# Altium PCB ESC.PcbDoc (part 1 of 2)
Units mm, origin at the board's own origin, x right, y up, seen from the top; angles counter-clockwise.
Board outline 33 x 33 mm, 4 copper layers (Top Layer, Layer 2, Layer 3, Bottom Layer), stack 0.603 mm thick; 138 components, 119 nets, 637 pads, 195 vias.
Unrouted connection lines stored in the file: 127.
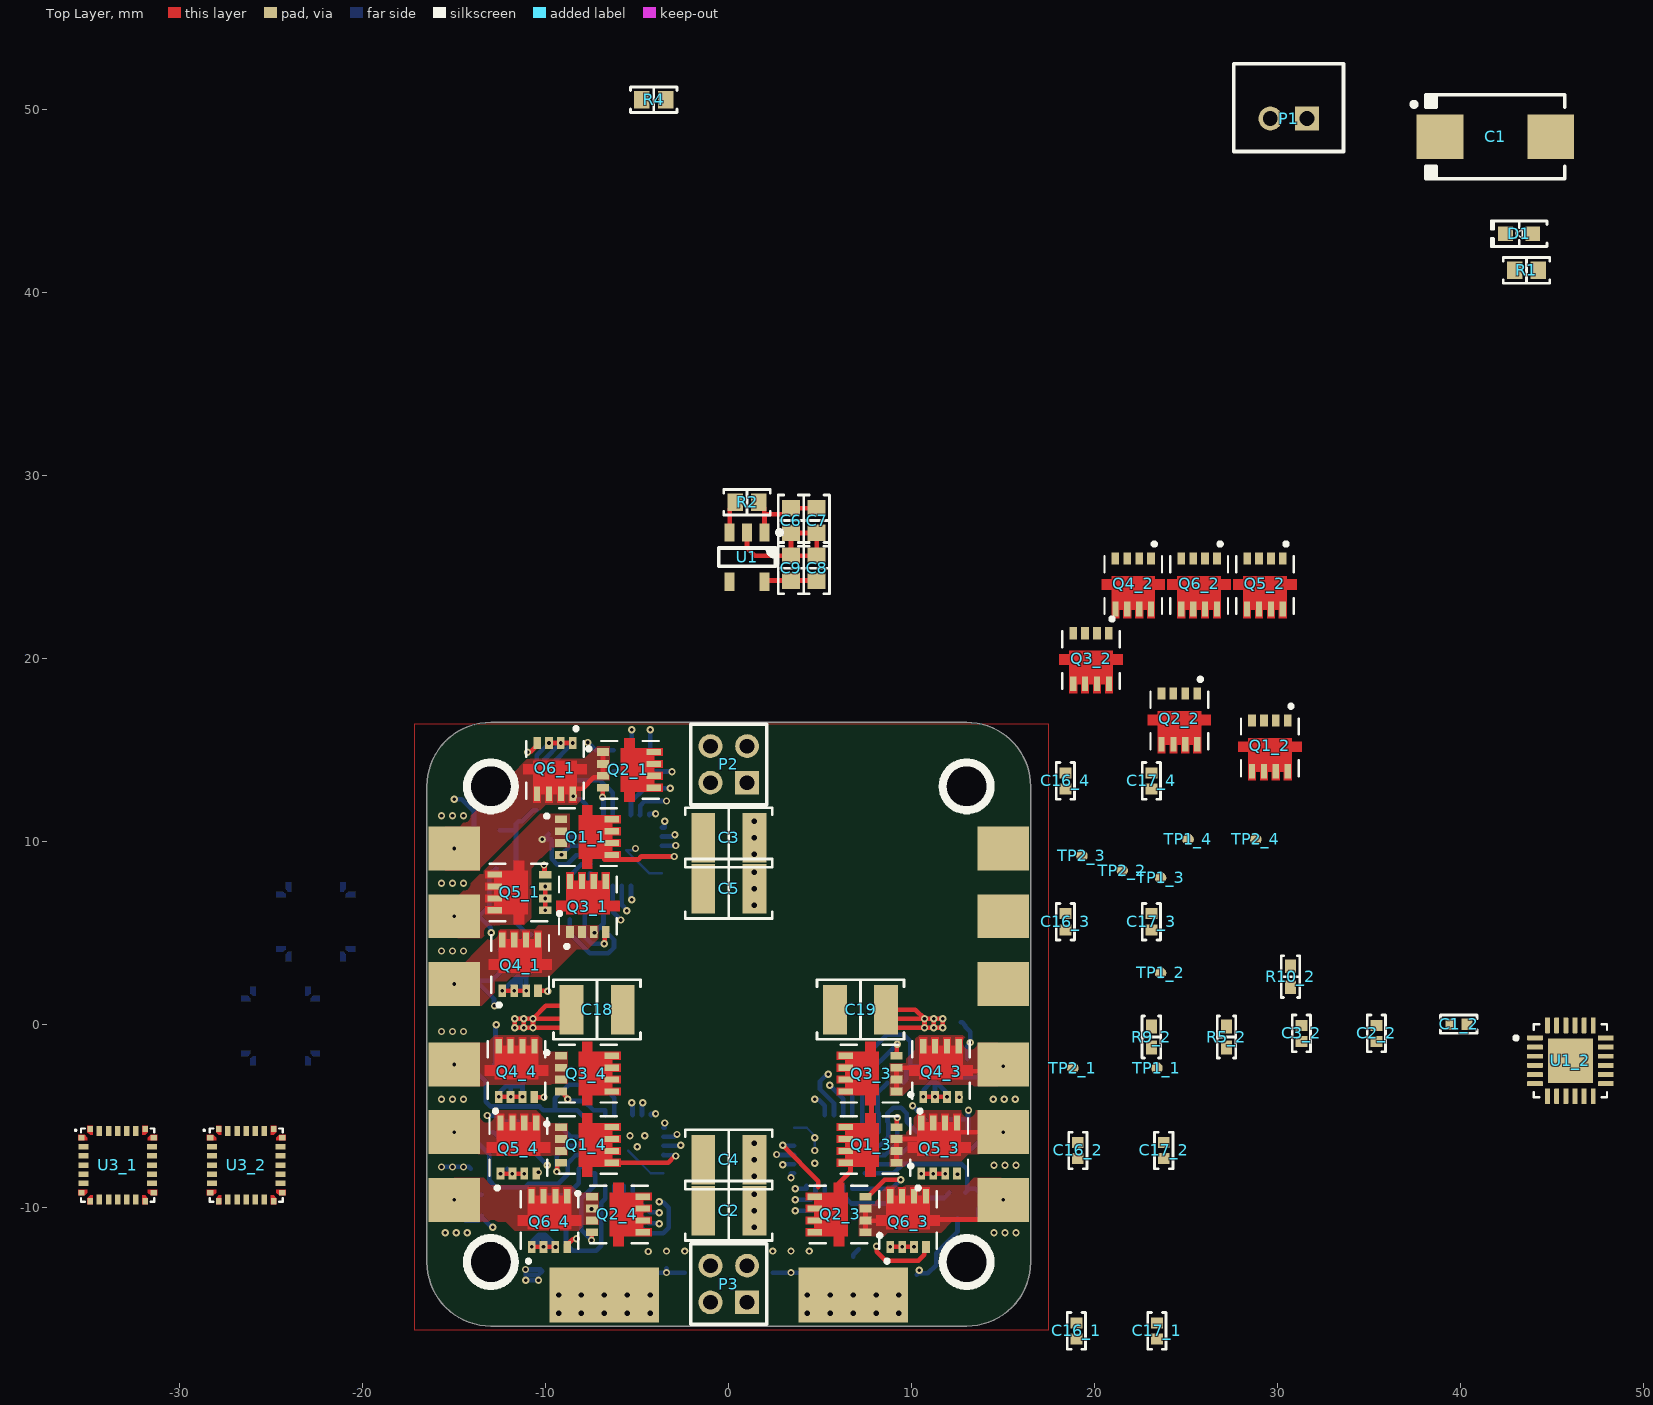
[diagram p0: Top Layer view]
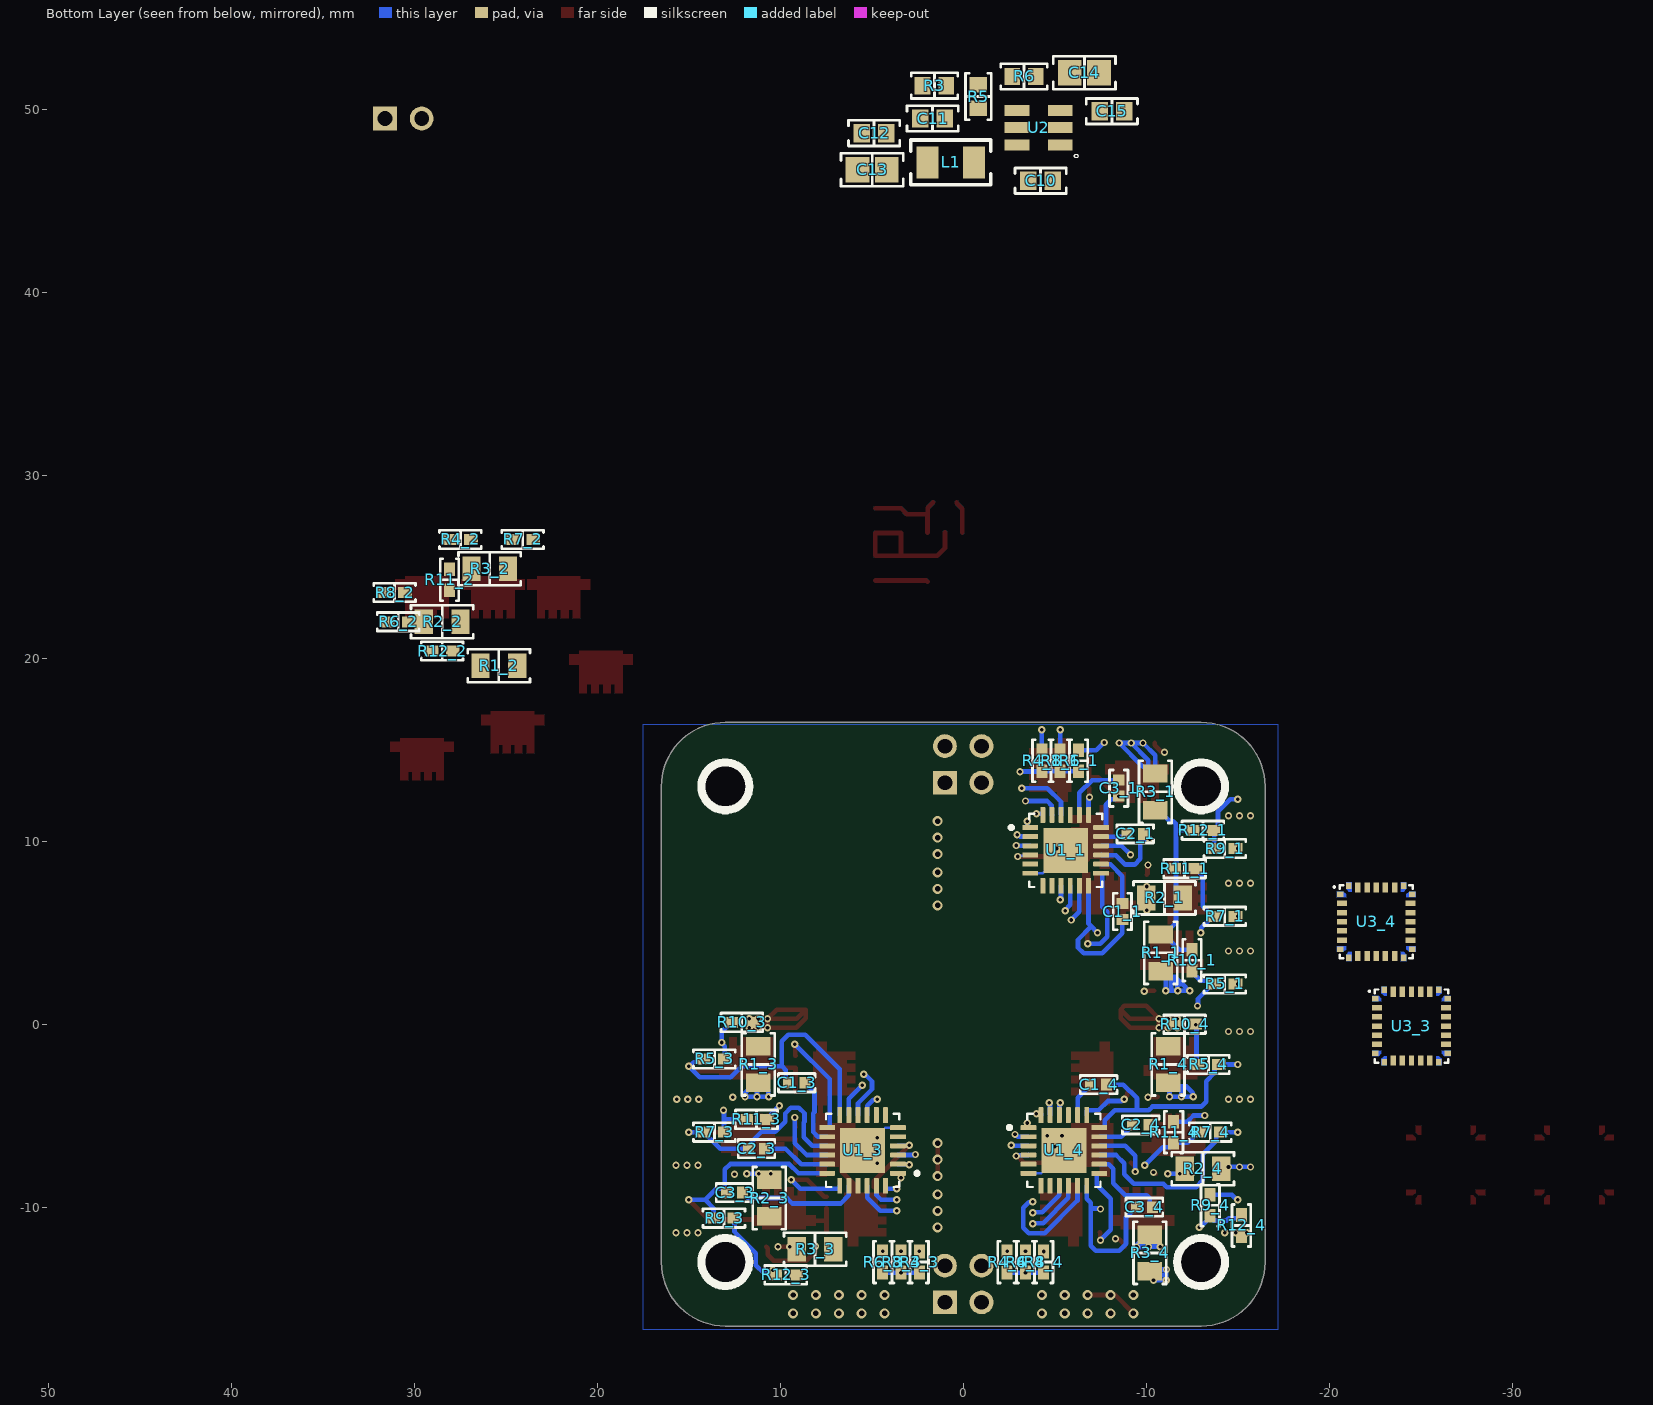
[diagram p1: Bottom Layer view, seen from below]
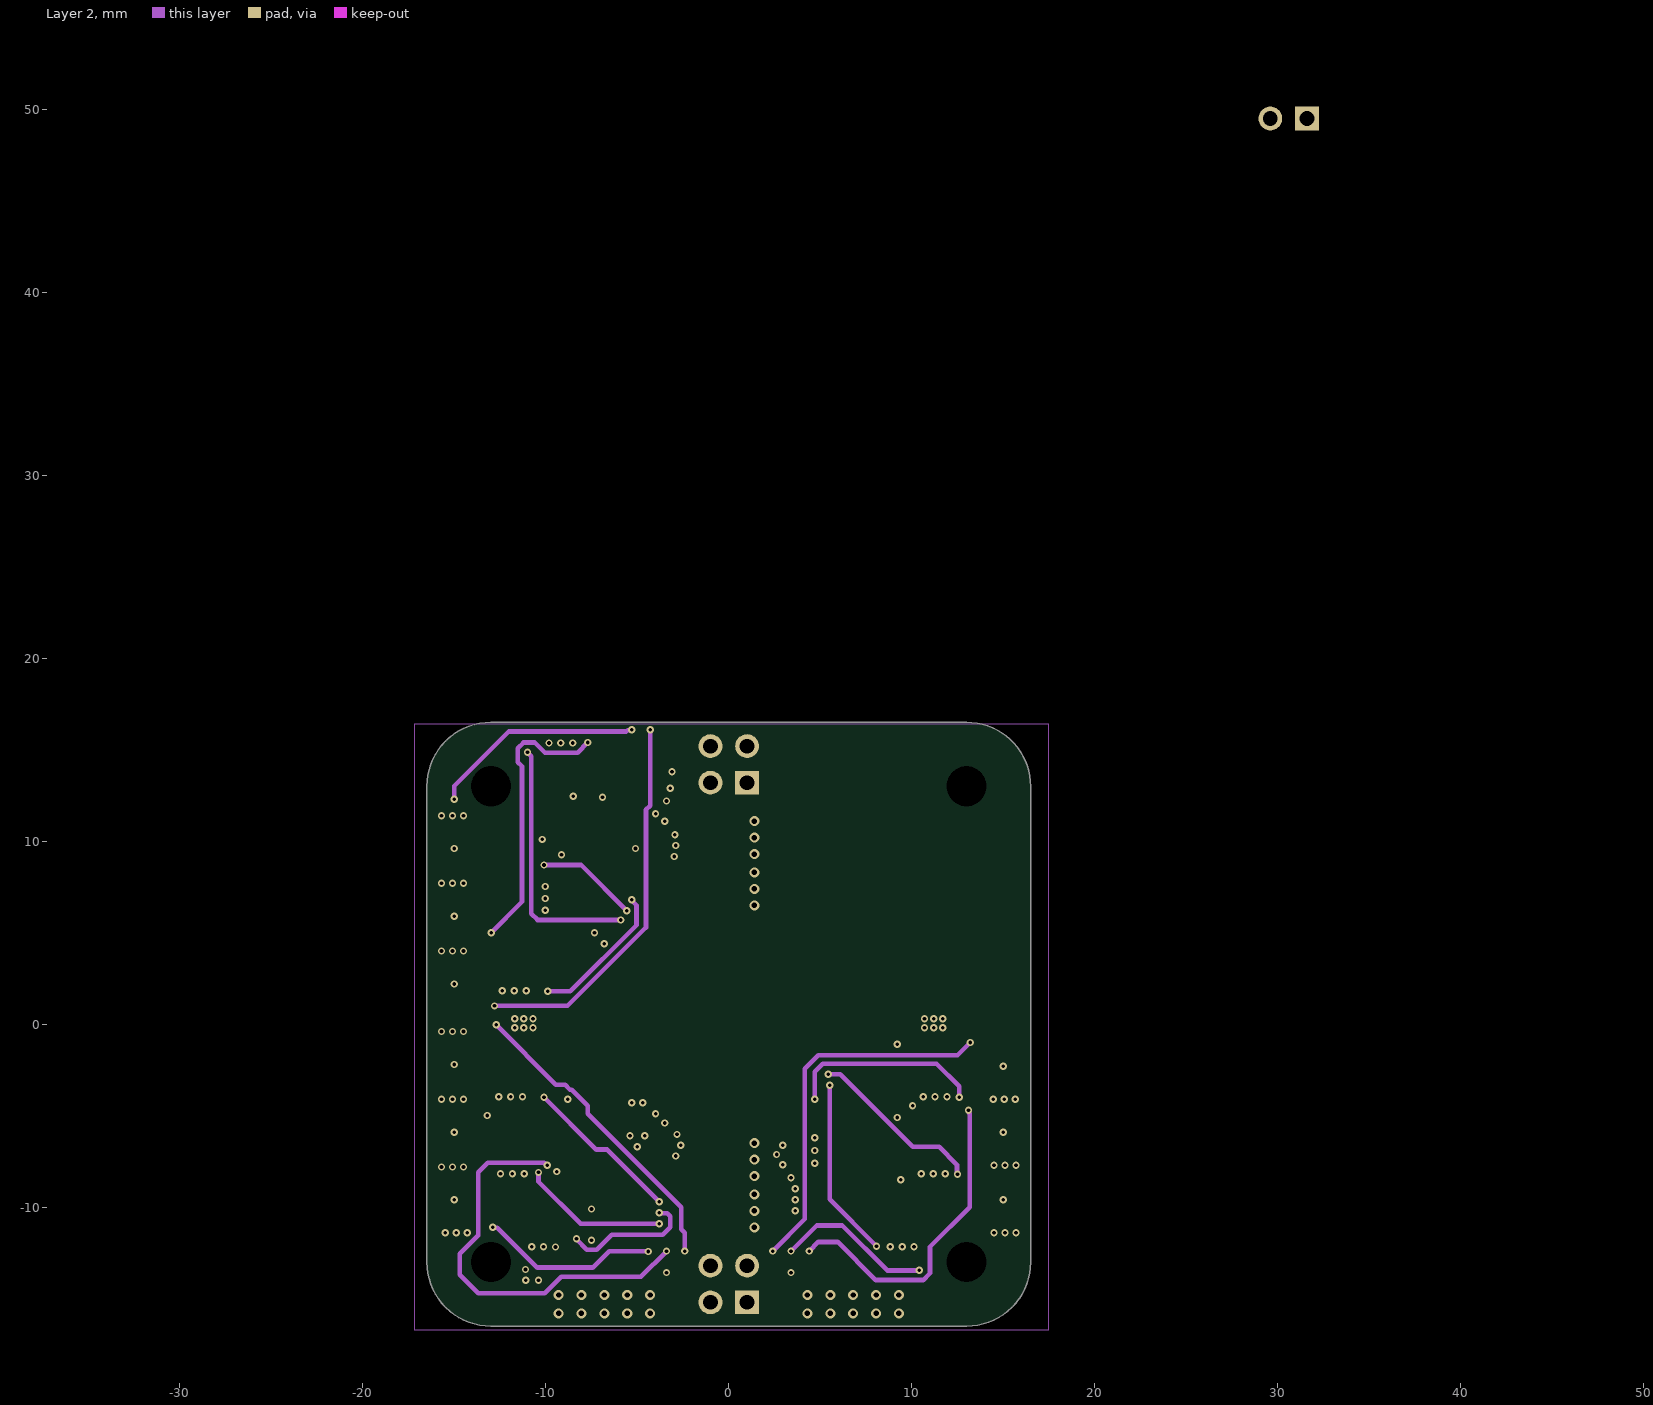
[diagram p2: Layer 2]
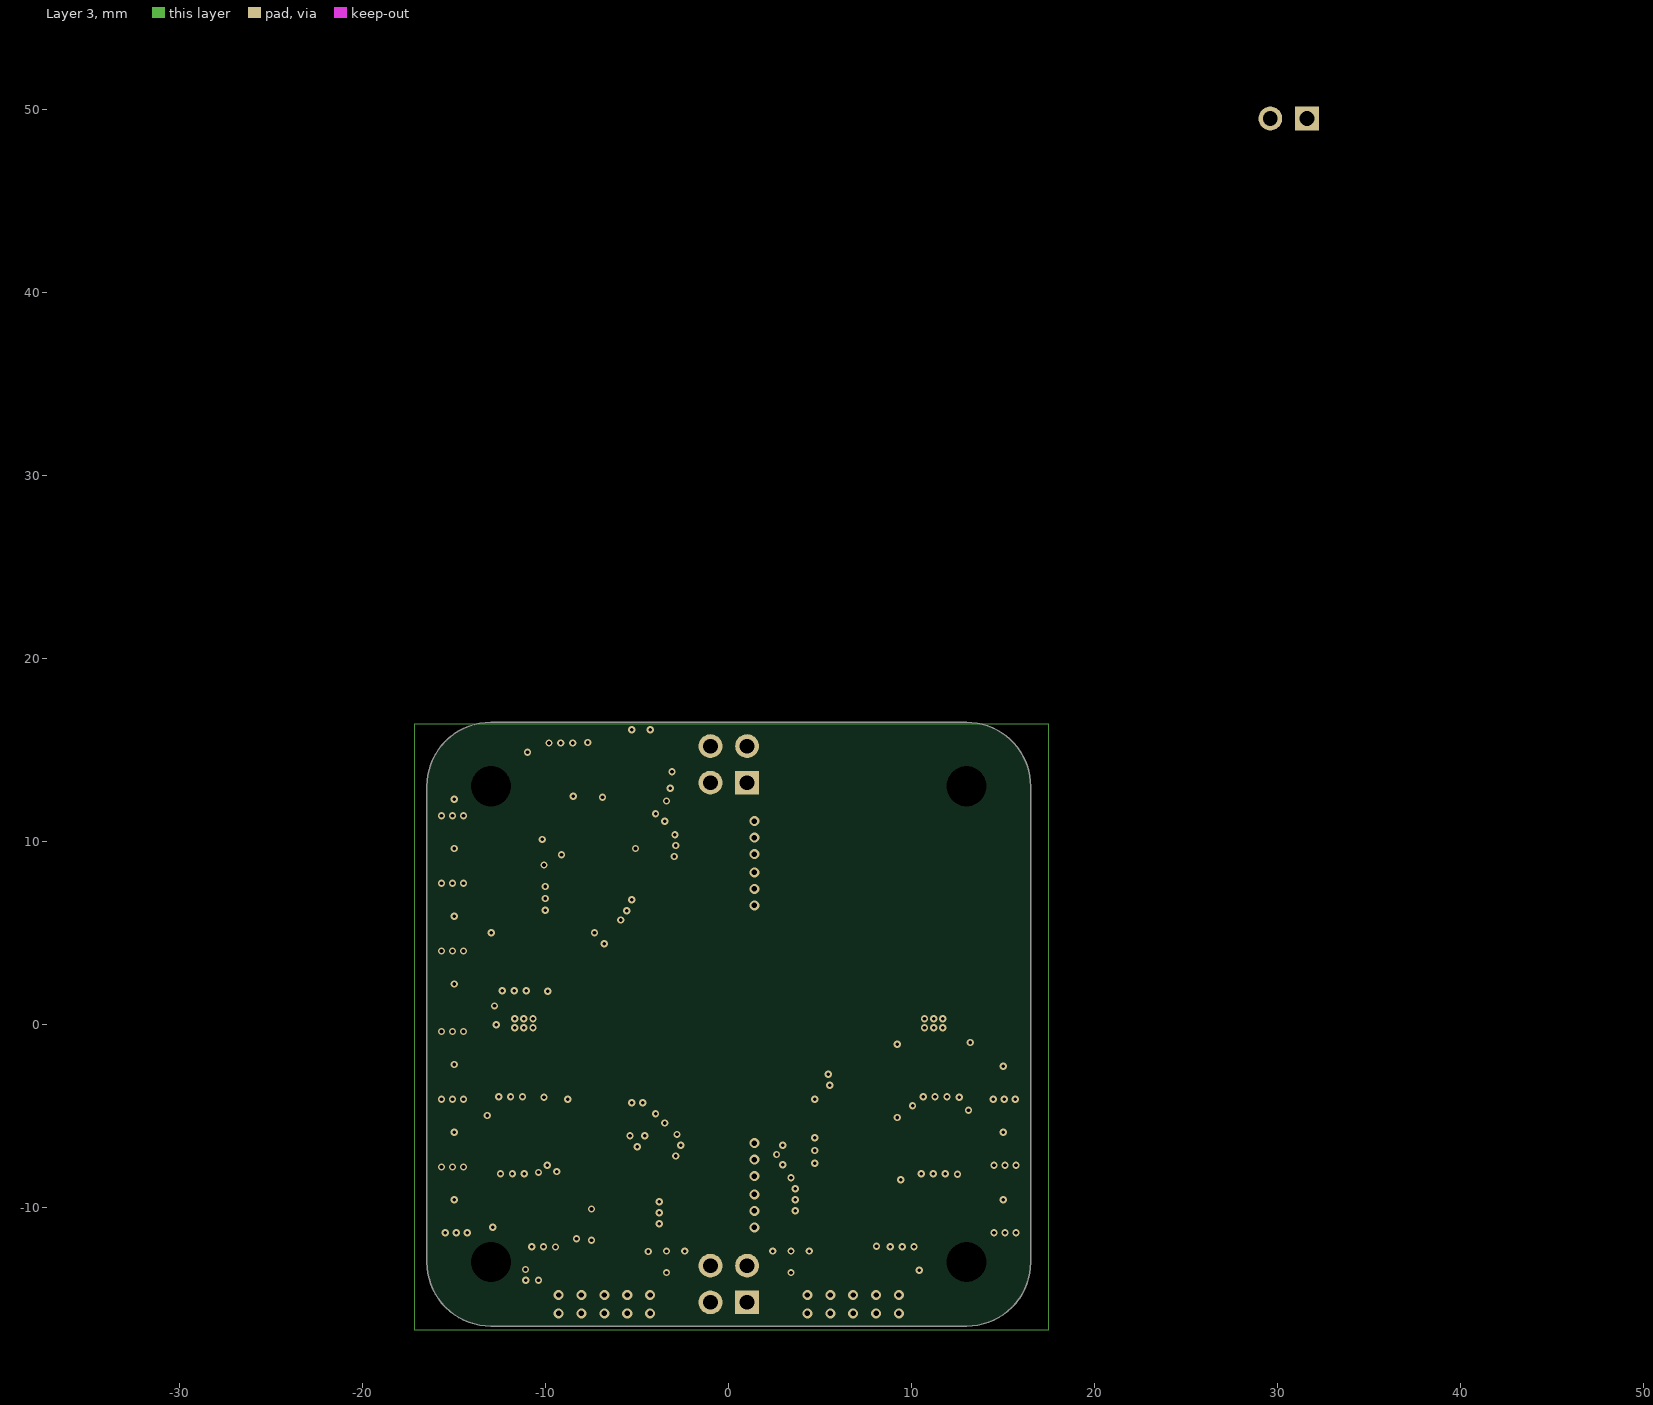
[diagram p3: Layer 3]

## Layer stack, top to bottom
Top Solder: solder mask 0.0102, Solder Resist, Dk 3.5
Top Layer: signal copper 0.0356
Dielectric 2: prepreg 0.0711, PP-006, Dk 4.1
Layer 2: signal copper 0.035
Dielectric 1: dielectric 0.32, FR-4, Dk 4.8
Layer 3: signal copper 0.035
Dielectric 3: prepreg 0.0711, PP-006, Dk 4.1
Bottom Layer: signal copper 0.0356
Bottom Solder: solder mask 0.0102, Solder Resist, Dk 3.5

## Board outline
-16.5,-13 -16.5,13 cw(c-13,13) -13,16.5 13,16.5 cw(c13,13) 16.5,13 16.5,-13 cw(c13,-13) 13,-16.5 -13,-16.5 cw(c-13,-13)

## Design rules (kind name [scope] priority, off if disabled: settings)
BoardOutlineClearance [All] p1: gap=0.2 ignorepadtopadclearanceinfootprint=FALSE
Clearance "PolyGon Pour Clearance" [InPolygon] p1: gap=0.2 ignorepadtopadclearanceinfootprint=FALSE
Clearance [All] p2: gap=0.2 ignorepadtopadclearanceinfootprint=TRUE except(0: Arc-Hole Track-Hole SMDPad-Hole THPad-Hole Via-Hole Fill-Hole Poly-Hole Region-Hole Text-Hole)
HoleSize [All] p1: absolutevalues=TRUE maxlimit=6.3 minlimit=0.2 maxpercent=80.000 minpercent=20.000
PolygonConnect PolygonRelief [IsPolygon and not (IsNamedPolygon('PolygonDirect'))] p1: thpad.connectstyle=Relief thpad.reliefconductorwidth=0.254 thpad.reliefentries=4 thpad.polygonreliefangle="90 Angle" thpad.airgapwidth=0.254 smdpad.connectstyle=Relief smdpad.reliefconductorwidth=0.254 smdpad.reliefentries=4 smdpad.polygonreliefangle="90 Angle" smdpad.airgapwidth=0.254 via.connectstyle=Direct via.reliefconductorwidth=0.254 via.reliefentries=4 via.polygonreliefangle="90 Angle" via.airgapwidth=0.254
PolygonConnect [All] p2: connectstyle=Direct reliefconductorwidth=0.254 reliefentries=4 polygonreliefangle="90 Angle" airgapwidth=0.254
RoomDefinition U_STM324 [InComponentClass('U_STM324')] p1: confinementstyle=ConfineIn formatcopy=TRUE lockcomponents=FALSE outline -55.9,-52 -5.1,-52 -5.1,-26.6 -55.9,-26.6
RoomDefinition U_STM323 [InComponentClass('U_STM323')] p2: confinementstyle=ConfineIn formatcopy=TRUE lockcomponents=FALSE outline -55.9,-52 -5.1,-52 -5.1,-26.6 -55.9,-26.6
RoomDefinition U_STM322 [InComponentClass('U_STM322')] p3: confinementstyle=ConfineIn formatcopy=TRUE lockcomponents=FALSE outline -55.9,-52 -5.1,-52 -5.1,-26.6 -55.9,-26.6
RoomDefinition U_STM321 [InComponentClass('U_STM321')] p4: confinementstyle=ConfineIn formatcopy=TRUE lockcomponents=FALSE outline -55.9,-52 -5.1,-52 -5.1,-26.6 -55.9,-26.6
RoomDefinition U_Motor_3 [InComponentClass('U_Motor1')] p5: confinementstyle=ConfineIn formatcopy=TRUE lockcomponents=FALSE outline -55.9,-52 -5.1,-52 -5.1,-26.6 -55.9,-26.6
RoomDefinition U_Motor_2 [InComponentClass('U_Motor1')] p6: confinementstyle=ConfineIn formatcopy=TRUE lockcomponents=FALSE outline -55.9,-52 -5.1,-52 -5.1,-26.6 -55.9,-26.6
RoomDefinition U_Motor_1 [InComponentClass('U_Motor1')] p7: confinementstyle=ConfineIn formatcopy=TRUE lockcomponents=FALSE outline -55.9,-52 -5.1,-52 -5.1,-26.6 -55.9,-26.6
RoomDefinition U_Motor1 [InComponentClass('U_Motor1')] p8: confinementstyle=ConfineIn formatcopy=TRUE lockcomponents=FALSE outline -55.9,-52 -5.1,-52 -5.1,-26.6 -55.9,-26.6
RoomDefinition U_5V_buck [InComponentClass('U_5V_buck')] p9: confinementstyle=ConfineIn formatcopy=TRUE lockcomponents=FALSE outline -9.854,48.871 -9.854,50.929 -8.654,50.929 -8.654,53.229 -4.596,53.229 -4.596,52.829 -1.696,52.829 -1.696,52.329 3.204,52.329 3.204,50.529 3.404,50.529 3.404,49.729 6.604,49.729 6.604,47.929 7.004,47.929 7.004,45.471 -2.496,45.471 -2.496,45.071 -5.954,45.071 -5.954,46.971 -6.654,46.971 -6.654,48.871
RoomDefinition U_3V3_LDO [InComponentClass('U_3V3_LDO')] p10: confinementstyle=ConfineIn formatcopy=TRUE lockcomponents=FALSE outline -0.904,23.319 -0.904,27.731 -0.629,27.731 -0.629,29.554 2.629,29.554 2.629,29.254 4.429,29.254 5.829,29.254 5.829,25.796 5.829,23.196 4.429,23.196 2.371,23.196 2.371,23.319
RoutingVias [All] p1: holewidth=0.3 width=0.55 viastyle="Through Hole" minholewidth=0.2 minwidth=0.4 maxholewidth=0.7 maxwidth=1.27
SolderMaskExpansion [All] p1: expansion=0.102 istentingtop=FALSE
Width [All] p1: maxlimit=0.712 minlimit=0.127 preferedwidth=0.254
29 further rules are at their usual default settings.

## Classes and differential pairs
channel class STM32: U_STM321 U_STM322 U_STM323 U_STM324
component class U_STM324: C16_4 C17_4 TP1_4 TP2_4 U3_4
component class U_STM323: C16_3 C17_3 TP1_3 TP2_3 U3_3
component class U_STM322: C16_2 C17_2 TP1_2 TP2_2 U3_2
component class U_STM321: C16_1 C17_1 TP1_1 TP2_1 U3_1
component class U_5V_buck: C10 C11 C12 C13 C14 C15 L1 R3 R4 R5 R6 U2
component class U_3V3_LDO: C6 C7 C8 C9 R2 U1
component class U_Motor1: C1_4 C2_4 C3_4 Q1_4 Q2_4 Q3_4 Q4_4 Q5_4 Q6_4 R1_4 R2_4 R3_4 R4_4 R5_4 R6_4 R7_4 R8_4 R9_4 R10_4 R11_4 R12_4 U1_4
component class U_Motor1: C1_3 C2_3 C3_3 Q1_3 Q2_3 Q3_3 Q4_3 Q5_3 Q6_3 R1_3 R2_3 R3_3 R4_3 R5_3 R6_3 R7_3 R8_3 R9_3 R10_3 R11_3 R12_3 U1_3
component class U_Motor1: C1_2 C2_2 C3_2 Q1_2 Q2_2 Q3_2 Q4_2 Q5_2 Q6_2 R1_2 R2_2 R3_2 R4_2 R5_2 R6_2 R7_2 R8_2 R9_2 R10_2 R11_2 R12_2 U1_2
component class U_Motor1: C1_1 C2_1 C3_1 Q1_1 Q2_1 Q3_1 Q4_1 Q5_1 Q6_1 R1_1 R2_1 R3_1 R4_1 R5_1 R6_1 R7_1 R8_1 R9_1 R10_1 R11_1 R12_1 U1_1

## Components (designator, comment, footprint, x,y, rotation, side; value= is the part's Value field where it differs from the comment)
C1 "100µF" "CAP POL 2917_7343" 41.9,48.5 r0 top
C1_1 "0.1 µF" "CAP 0402_1005" -8.7,6.16 r270 bottom
C1_2 "0.1 µF" "CAP 0402_1005" 39.9,0 r0 top
C1_3 "0.1 µF" "CAP 0402_1005" 9.1,-3.2 r0 bottom
C1_4 "0.1 µF" "CAP 0402_1005" -7.4,-3.3 r180 bottom
C2 "100µF" "CAP 1210_3225 - 2.8MM" 0,-10.2 r180 top
C2_1 "0.1 µF" "CAP 0402_1005" -9.4,10.4 r180 bottom
C2_2 "0.1 µF" "CAP 0402_1005" 35.4,-0.5 r90 top
C2_3 "0.1 µF" "CAP 0402_1005" 11.3,-6.8 r0 bottom
C2_4 "0.1 µF" "CAP 0402_1005" -9.7,-5.5 r180 bottom
C3 "100µF" "CAP 1210_3225 - 2.8MM" 0,10.2 r180 top
C3_1 "0.1 µF" "CAP 0402_1005" -8.5,12.9 r270 bottom
C3_2 "0.1 µF" "CAP 0402_1005" 31.3,-0.5 r90 top
C3_3 "0.1 µF" "CAP 0402_1005" 12.5,-9.2 r0 bottom
C3_4 "0.1 µF" "CAP 0402_1005" -9.9,-10 r0 bottom
C4 "100µF" "CAP 1210_3225 - 2.8MM" 0,-7.4 r180 top
C5 "100µF" "CAP 1210_3225 - 2.8MM" 0,7.4 r180 top
C6 "1µF" "CAP 0603_1608" 3.4,27.525 r90 top
C7 "0.1µF" "CAP 0603_1608" 4.8,27.525 r270 top
C8 "0.1µF" "CAP 0603_1608" 4.8,24.925 r90 top
C9 "1µF" "CAP 0603_1608" 3.4,24.925 r270 top
C10 "1µF" "CAP 0603_1608" -4.225,46.1 r0 bottom
C11 "47pF" "CAP 0603_1608" 1.675,49.5 r0 bottom
C12 "1µF" "CAP 0603_1608" 4.875,48.7 r180 bottom
C13 "22µF" "CAP 0805_2012" 4.975,46.7 r180 bottom
C14 "22µF" "CAP 0805_2012" -6.625,52 r180 bottom
C15 "0.1µF" "CAP 0603_1608" -8.125,49.9 r180 bottom
C16_1 "0.1 µF" "CAP 0402_1005" 19,-16.76 r90 top (schematic designator C16)
C16_2 "0.1 µF" "CAP 0402_1005" 19.075,-6.9 r90 top (schematic designator C16)
C16_3 "0.1 µF" "CAP 0402_1005" 18.4,5.6 r90 top (schematic designator C16)
C16_4 "0.1 µF" "CAP 0402_1005" 18.4,13.3 r90 top (schematic designator C16)
C17_1 "0.1 µF" "CAP 0402_1005" 23.4,-16.76 r90 top (schematic designator C17)
C17_2 "0.1 µF" "CAP 0402_1005" 23.775,-6.9 r90 top (schematic designator C17)
C17_3 "0.1 µF" "CAP 0402_1005" 23.1,5.6 r90 top (schematic designator C17)
C17_4 "0.1 µF" "CAP 0402_1005" 23.1,13.3 r90 top (schematic designator C17)
C18 "100µF" "CAP 1210_3225 - 2.8MM" -7.2,0.8 r0 top
C19 "100µF" "CAP 1210_3225 - 2.8MM" 7.2,0.8 r180 top
D1 "Green" "LED 0603_1608 GREEN" 43.2,43.2 r180 top
L1 "4.7µH" "IND 1008_2520" 0.675,47.1 r0 bottom
P1 "2 pin 2mm JST Male" "2pin - 2mm JST male" 30.6,49.5 r180 top
P2 "62000421121" 62000421121 0,14.2 r90 top
P3 "62000421121" 62000421121 0,-14.2 r90 top
Q1_1 "NVTFS5C680NL" NVTFS015N04CTAG -7.7,10.225 r0 top
Q1_2 "NVTFS5C680NL" NVTFS015N04CTAG 29.575,15.13 r270 top
Q1_3 "NVTFS5C680NL" NVTFS015N04CTAG 7.7,-6.6 r180 top
Q1_4 "NVTFS5C680NL" NVTFS015N04CTAG -7.7,-6.6 r0 top
Q2_1 "NVTFS5C680NL" NVTFS015N04CTAG -5.4,13.9 r0 top
Q2_2 "NVTFS5C680NL" NVTFS015N04CTAG 24.625,16.6 r270 top
Q2_3 "NVTFS5C680NL" NVTFS015N04CTAG 6,-10.4 r180 top
Q2_4 "NVTFS5C680NL" NVTFS015N04CTAG -6,-10.4 r0 top
Q3_1 "NVTFS5C680NL" NVTFS015N04CTAG -7.7,6.5 r90 top
Q3_2 "NVTFS5C680NL" NVTFS015N04CTAG 19.8,19.9 r270 top
Q3_3 "NVTFS5C680NL" NVTFS015N04CTAG 7.7,-2.7 r180 top
Q3_4 "NVTFS5C680NL" NVTFS015N04CTAG -7.7,-2.7 r0 top
Q4_1 "NVTFS5C680NL" NVTFS015N04CTAG -11.4,3.3 r90 top
Q4_2 "NVTFS5C680NL" NVTFS015N04CTAG 22.106,23.994 r270 top
Q4_3 "NVTFS5C680NL" NVTFS015N04CTAG 11.6,-2.5 r90 top
Q4_4 "NVTFS5C680NL" NVTFS015N04CTAG -11.6,-2.5 r90 top
Q5_1 "NVTFS5C680NL" NVTFS015N04CTAG -11.5,7.2 r180 top
Q5_2 "NVTFS5C680NL" NVTFS015N04CTAG 29.306,23.994 r270 top
Q5_3 "NVTFS5C680NL" NVTFS015N04CTAG 11.5,-6.7 r90 top
Q5_4 "NVTFS5C680NL" NVTFS015N04CTAG -11.5,-6.7 r90 top
Q6_1 "NVTFS5C680NL" NVTFS015N04CTAG -9.5,13.9 r270 top
Q6_2 "NVTFS5C680NL" NVTFS015N04CTAG 25.706,23.994 r270 top
Q6_3 "NVTFS5C680NL" NVTFS015N04CTAG 9.8,-10.7 r90 top
Q6_4 "NVTFS5C680NL" NVTFS015N04CTAG -9.8,-10.7 r90 top
R1 "1 kOhms" "RES 0603_1608" 43.6,41.2 r180 top
R1_1 "20 mOhms" "STACKPOLE CSR0805" -10.8,3.9 r270 bottom
R1_2 "20 mOhms" "STACKPOLE CSR0805" 25.381,19.594 r180 bottom
R1_3 "20 mOhms" "STACKPOLE CSR0805" 11.2,-2.2 r270 bottom
R1_4 "20 mOhms" "STACKPOLE CSR0805" -11.2,-2.2 r270 bottom
R2 "10 kOhms" "RES 0603_1608" 1,28.525 r0 top
R2_1 "20 mOhms" "STACKPOLE CSR0805" -11,6.9 r0 bottom
R2_2 "20 mOhms" "STACKPOLE CSR0805" 28.481,21.994 r0 bottom
R2_3 "20 mOhms" "STACKPOLE CSR0805" 10.6,-9.5 r90 bottom
R2_4 "20 mOhms" "STACKPOLE CSR0805" -13.1,-7.9 r0 bottom
R3 "40.2 kOhms" "RES 0603_1608" 1.575,51.3 r0 bottom
R3_1 "20 mOhms" "STACKPOLE CSR0805" -10.5,12.7 r90 bottom
R3_2 "20 mOhms" "STACKPOLE CSR0805" 25.881,24.894 r0 bottom
R3_3 "20 mOhms" "STACKPOLE CSR0805" 8.1,-12.3 r0 bottom
R3_4 "20 mOhms" "STACKPOLE CSR0805" -10.2,-12.5 r90 bottom
R4 "10 kOhms" "RES 0603_1608" -4.096,50.529 r0 top
R4_1 "1 kOhms" "RES 0402_1005" -4.3,14.4 r90 bottom
R4_2 "1 kOhms" "RES 0402_1005" 27.481,26.494 r0 bottom
R4_3 "1 kOhms" "RES 0402_1005" 2.4,-13 r90 bottom
R4_4 "1 kOhms" "RES 0402_1005" -2.4,-13 r90 bottom
R5 "75 kOhms" "RES 0603_1608" -0.825,50.7 r90 bottom
R5_1 "1 kOhms" "RES 0402_1005" -14.3,2.2 r180 bottom
R5_2 "1 kOhms" "RES 0402_1005" 27.2,-0.7 r90 top
R5_3 "1 kOhms" "RES 0402_1005" 13.6,-1.9 r0 bottom
R5_4 "1 kOhms" "RES 0402_1005" -13.4,-2.2 r180 bottom
R6 "7.68 kOhms" "RES 0603_1608" -3.325,51.8 r0 bottom
R6_1 "1 kOhms" "RES 0402_1005" -6.3,14.4 r90 bottom
R6_2 "1 kOhms" "RES 0402_1005" 30.881,21.994 r0 bottom
R6_3 "1 kOhms" "RES 0402_1005" 4.4,-13 r90 bottom
R6_4 "1 kOhms" "RES 0402_1005" -3.4,-13 r90 bottom
R7_1 "1 kOhms" "RES 0402_1005" -14.3,5.9 r180 bottom
R7_2 "1 kOhms" "RES 0402_1005" 24.081,26.494 r0 bottom
R7_3 "1 kOhms" "RES 0402_1005" 13.6,-5.9 r0 bottom
R7_4 "1 kOhms" "RES 0402_1005" -13.5,-5.9 r180 bottom
R8_1 "1 kOhms" "RES 0402_1005" -5.3,14.4 r90 bottom
R8_2 "1 kOhms" "RES 0402_1005" 31.081,23.594 r0 bottom
R8_3 "1 kOhms" "RES 0402_1005" 3.4,-13 r90 bottom
R8_4 "1 kOhms" "RES 0402_1005" -4.4,-13 r90 bottom
R9_1 "1 kOhms" "RES 0402_1005" -14.3,9.6 r180 bottom
R9_2 "1 kOhms" "RES 0402_1005" 23.1,-0.7 r90 top
R9_3 "1 kOhms" "RES 0402_1005" 13.075,-10.6 r0 bottom
R9_4 "1 kOhms" "RES 0402_1005" -13.5,-9.9 r90 bottom
R10_1 "1 kOhms" "RES 0402_1005" -12.5,3.5 r270 bottom
R10_2 "1 kOhms" "RES 0402_1005" 30.7,2.6 r90 top
R10_3 "1 kOhms" "RES 0402_1005" 12.1,0.1 r0 bottom
R10_4 "1 kOhms" "RES 0402_1005" -12.1,0 r180 bottom
R11_1 "1 kOhms" "RES 0402_1005" -12.1,8.5 r180 bottom
R11_2 "1 kOhms" "RES 0402_1005" 28.081,24.294 r90 bottom
R11_3 "1 kOhms" "RES 0402_1005" 11.3,-5.2 r0 bottom
R11_4 "1 kOhms" "RES 0402_1005" -11.5,-5.9 r270 bottom
R12_1 "1 kOhms" "RES 0402_1005" -13.1,10.6 r180 bottom
R12_2 "1 kOhms" "RES 0402_1005" 28.481,20.394 r180 bottom
R12_3 "1 kOhms" "RES 0402_1005" 9.7,-13.7 r0 bottom
R12_4 "1 kOhms" "RES 0402_1005" -15.2,-11 r90 bottom
TP1_1 "0.635mm" "TP  0.635mm" 23.4,-2.4 r0 top (schematic designator TP1)
TP1_2 "0.635mm" "TP  0.635mm" 23.6,2.8 r0 top (schematic designator TP1)
TP1_3 "0.635mm" "TP  0.635mm" 23.6,8 r0 top (schematic designator TP1)
TP1_4 "0.635mm" "TP  0.635mm" 25.1,10.1 r0 top (schematic designator TP1)
TP2_1 "0.635mm" "TP  0.635mm" 18.8,-2.4 r0 top (schematic designator TP2)
TP2_2 "0.635mm" "TP  0.635mm" 21.5,8.4 r0 top (schematic designator TP2)
TP2_3 "0.635mm" "TP  0.635mm" 19.3,9.2 r0 top (schematic designator TP2)
TP2_4 "0.635mm" "TP  0.635mm" 28.8,10.1 r0 top (schematic designator TP2)
U1 "MIC5504" "TI SOT-23-5 DBV" 1,25.525 r270 top
U1_1 "FD6288Q" QFN50P400X400X100-25N -5.6,9.5 r180 bottom
U1_2 "FD6288Q" QFN50P400X400X100-25N 46,-2 r0 top
U1_3 "FD6288Q" QFN50P400X400X100-25N 5.5,-6.9 r0 bottom
U1_4 "FD6288Q" QFN50P400X400X100-25N -5.5,-6.9 r180 bottom
U2 "AP65211A" TSOT-26-6 -4.125,49 r0 bottom
U3_1 "STM32F0" QFN50P400X400X60-28N -33.4,-7.7 r0 top (schematic designator U3)
U3_2 "STM32F0" QFN50P400X400X60-28N -26.375,-7.7 r0 top (schematic designator U3)
U3_3 "STM32F0" QFN50P400X400X60-28N -24.5,-0.1 r180 bottom (schematic designator U3)
U3_4 "STM32F0" QFN50P400X400X60-28N -22.575,5.6 r180 bottom (schematic designator U3)

## Footprints (in the part's own frame and the unit in brackets; to place one, negate y for a bottom-side part, rotate by r counter-clockwise, add the part's x,y. Pads: shape width x height; smd on the part's side, far side on the other; paste and mask are expansions set on the pad)
"2pin - 2mm JST male" [mm]
  rect 1.3x1.3 hole 0.8: 1(-1,0)
  round 1.3 hole 0.8: 2(1,0)
  silkscreen extent -3,-3 3,1.8, body extent -2.93,-2.97 2.93,1.7, height 5.89
62000421121 [mm] "2.00 mm THT Dual Pin Header, 4p"
  rect 1.3x1.3 hole 0.8: 1(-1,-1)
  round 1.3 hole 0.8: 2(-1,1) 3(1,-1) 4(1,1)
  silkscreen extent -2.2,-2.07 2.2,2.07, body extent -2,-2 2,2, height 6.05
"CAP 0402_1005" [mm] "Chip Capacitor, 2-Leads, Body 1.02x0.51mm, IPC Medium Density"
  rect 0.6x0.64 smd: 1(-0.44,0) 2(0.44,0)
  silkscreen extent -1,-0.5 1,0.5, body extent -0.5,-0.26 0.5,0.26, height 0.52
"CAP 0603_1608" [mm] "Chip Capacitor, 2-Leads, Body 1.60x0.80mm, IPC Medium Density"
  rect 0.9x1 smd: 1(-0.675,0) 2(0.675,0)
  silkscreen extent -1.4,-0.7 1.4,0.7, body extent -0.8,-0.41 0.8,0.41, height 0.82
"CAP 0805_2012" [mm] "Chip Capacitor, 2-Leads, Body 2.00x1.20mm, IPC Medium Density"
  rect 1.3x1.4 smd: 1(-0.8,0) 2(0.8,0)
  silkscreen extent -1.7,-0.9 1.7,0.9, body extent -1,-0.64 1,0.64, height 1.26
"CAP 1210_3225 - 2.8MM" [mm] "Chip Capacitor, 2-Leads, Body 3.20x2.50mm, IPC Medium Density"
  rect 1.3x2.7 smd: 1(-1.4,0) 2(1.4,0)
  silkscreen extent -2.37,-1.63 2.37,1.63, body extent -1.6,-1.25 1.6,1.25, height 2.8
"CAP POL 2917_7343" [mm] "Molded Capacitor, 2-Leads, Body 7.30x4.30mm, IPC Medium Density"
  rect 2.55x2.45 smd: 1(-3.025,0) 2(3.025,0)
  silkscreen extent -4.57,-2.3 3.8,2.3, body extent -3.65,-2.15 3.65,2.15, height 4.1
"IND 1008_2520" [mm] "Chip Inductance, 2-leads, Body 2.5x2.1mm, IPC Medium Density"
  rect 1.2x1.75 smd: 1(-1.275,0) 2(1.275,0)
  silkscreen extent -2.18,-1.22 2.2,1.22, body extent -1.3,-1.05 1.3,1.05, height 1
"LED 0603_1608 GREEN" [mm] "Chip Diode, 2-Leads, Body 1.60x0.80mm, IPC Medium Density"
  rect 0.8x0.8 smd: 1(-0.75,0) 2(0.75,0)
  silkscreen extent -1.52,-0.7 1.52,0.7, body extent -0.8,-0.4 0.8,0.4, height 0.53
NVTFS015N04CTAG [mm]
  rect 0.66x0.42 smd: 1(-1.47,0.975) 2(-1.47,0.325) 3(-1.47,-0.325) 4(-1.47,-0.975)
  rect 0.8x0.34 smd: 5(1.3,-0.975) 6(1.3,-0.325) 7(1.3,0.325) 8(1.3,0.975)
  Top Layer region: -0.5,-1.185 -0.5,1.185 -0.32,1.185 -0.32,1.73 0.25,1.73 0.25,1.185 1.8,1.185 1.8,0.765 1.33,0.765 1.33,0.535 1.8,0.535 1.8,0.115 1.33,0.115 1.33,-0.115 1.8,-0.115 1.8,-0.535 1.33,-0.535 1.33,-0.765 1.8,-0.765 1.8,-1.185 0.25,-1.185 0.25,-1.73 -0.32,-1.73 -0.32,-1.185
  silkscreen extent -2.35,-1.58 1.58,1.58, body extent -1.7,-1.7 1.7,1.7, height 1.1
QFN50P400X400X60-28N [mm]
  rect 0.35x0.3 smd mask+0: 1(-1.975,1.5) 7(-1.975,-1.5) 15(1.975,-1.5) 21(1.975,1.5)
  rect 0.55x0.3 smd mask+0.051: 2(-1.875,1) 3(-1.875,0.5) 4(-1.875,0) 5(-1.875,-0.5) 6(-1.875,-1) 16(1.875,-1) 17(1.875,-0.5) 18(1.875,0) 19(1.875,0.5) 20(1.875,1)
  rect 0.3x0.35 smd mask+0: 8(-1.5,-1.975) 14(1.5,-1.975) 22(1.5,1.975) 28(-1.5,1.975)
  rect 0.3x0.55 smd mask+0.051: 9(-1,-1.875) 10(-0.5,-1.875) 11(0,-1.875) 12(0.5,-1.875) 13(1,-1.875) 23(1,1.875) 24(0.5,1.875) 25(0,1.875) 26(-0.5,1.875) 27(-1,1.875)
  Top Layer region: 1.65,-1.8 1.65,-2.15 1.35,-2.15 1.35,-1.65 1.5,-1.65
  Top Layer region: -1.65,-1.5 -1.8,-1.65 -2.15,-1.65 -2.15,-1.35 -1.65,-1.35
  Top Layer region: -1.35,-2.15 -1.65,-2.15 -1.65,-1.8 -1.5,-1.65 -1.35,-1.65
  Top Layer region: 2.15,-1.65 1.8,-1.65 1.65,-1.5 1.65,-1.35 2.15,-1.35
  Top Layer region: 2.15,1.35 1.65,1.35 1.65,1.5 1.8,1.65 2.15,1.65
  Top Layer region: 1.65,1.8 1.5,1.65 1.35,1.65 1.35,2.15 1.65,2.15
  Top Layer region: -1.35,1.65 -1.5,1.65 -1.65,1.8 -1.65,2.15 -1.35,2.15
  Top Layer region: -1.65,1.5 -1.65,1.35 -2.15,1.35 -2.15,1.65 -1.8,1.65
  silkscreen extent -2.35,-2 2,2, body extent -2,-2 2,2, height 0.68
QFN50P400X400X100-25N [mm]
  rrect25% 0.86x0.27 smd: 1(-1.935,1.25) 2(-1.935,0.75) 3(-1.935,0.25) 4(-1.935,-0.25) 5(-1.935,-0.75) 6(-1.935,-1.25) 13(1.935,-1.25) 14(1.935,-0.75) 15(1.935,-0.25) 16(1.935,0.25) 17(1.935,0.75) 18(1.935,1.25)
  rrect25% 0.27x0.86 smd: 7(-1.25,-1.935) 8(-0.75,-1.935) 9(-0.25,-1.935) 10(0.25,-1.935) 11(0.75,-1.935) 12(1.25,-1.935) 19(1.25,1.935) 20(0.75,1.935) 21(0.25,1.935) 22(-0.25,1.935) 23(-0.75,1.935) 24(-1.25,1.935)
  rect 2.45x2.45 smd paste-0.45: 25(0,0)
  silkscreen extent -3.08,-2 2,2, body extent -2,-2 2,2, height 1
"RES 0402_1005" [mm] "Chip Resistor, 2-Leads, Body 1.0x0.5mm, IPC Medium Density"
  rect 0.75x0.6 smd: 1(-0.575,0) 2(0.575,0)
  silkscreen extent -1.14,-0.51 1.14,0.51, body extent -0.5,-0.25 0.5,0.25, height 0.35
"RES 0603_1608" [mm] "Chip Resistor, 2-Leads, Body 1.60x0.80mm, IPC Medium Density"
  rect 0.85x0.95 smd: 1(-0.65,0) 2(0.65,0)
  silkscreen extent -1.27,-0.7 1.27,0.7, body extent -0.8,-0.4 0.8,0.4, height 0.45
"STACKPOLE CSR0805" [mm] "Chip Resistor, 2-Leads, Body 2.00x1.25mm, IPC Medium Density"
  rect 1x1.35 smd: 1(-1,0) 2(1,0)
  silkscreen extent -1.7,-0.9 1.7,0.9, body extent -1.05,-0.63 1.05,0.62, height 0.55
"TI SOT-23-5 DBV" [mm] "SOT23, 5-Leads, Body 2.90x2.80mm, Pitch 0.95mm, IPC Medium Density"
  rect 1x0.55 smd: 1(-1.35,0.95) 2(-1.35,0) 3(-1.35,-0.95) 4(1.35,-0.95) 5(1.35,0.95)
  silkscreen extent -1.47,-1.55 0.5,1.9, body extent -1.44,-1.43 1.39,1.48, height 1.5
"TP  0.635mm" [mm]
  round 0.635 smd: 1(0,0)
TSOT-26-6 [mm]
  rect 1.35x0.6 smd: 1(-1.185,0.95) 2(-1.185,0) 3(-1.185,-0.95) 4(1.185,-0.95) 5(1.185,0) 6(1.185,0.95)
  silkscreen extent -2.15,1.45 -1.95,1.65, body extent -1.2,-1.45 1.2,1.45, height 1

## Part data
C1: library part 293D107X0020E2TE3, "CAP TANT 100UF 20% 20V 2917", Device Package="2917 (7343 Metric)", ESR (Equivalent Series Resistance)=500mOhm, Manufacturer="Vishay Sprague", Manufacturer Size Code=E, Operating Temperature="-55°C ~ 125°C", Supplier Part Number 1=718-293D107X0020E2TE3CT-ND, Tolerance=±20%, Capacitance=100µF, ComponentLink1Description=Datasheet, ComponentLink1URL=http://www.vishay.com/docs/40002/293d.pdf, ComponentLink2Description="DigiKey Link", ComponentLink2URL=http://digikey.com/product-detail/en/vishay-sprague/293D107X0020E2TE3/718-293D107X0020E2TE3CT-ND/10507022, Features="General Purpose", Height - Seated (Max)="0.170\" (4.32mm)", LastUpdated="13-Aug-20 10:43:35 AM", Lifecycle Status=Active, Minimum Order=1, Mounting Type="Surface Mount", Package / Case="2917 (7343 Metric)", Packaging=TapeAndReel, Part Number=293D107X0020E2TE3, Part Status=Active, PartId=1360, Price=0.70, Series="TANTAMOUNT®, 293D", Size / Dimension="0.287\" L x 0.169\" W (7.30mm x 4.30mm)", Supplier 1=DigiKey, Type=Molded
C1_1 C1_2 C1_3 C1_4 C2_1 C2_2 C2_3 C2_4 C3_1 C3_2 C3_3 C3_4 C16_1 C16_2 C16_3 C16_4 C17_1 C17_2 C17_3 C17_4: library part C0402C104K4RACAUTO, "CAP CER 0.1UF 16V X7R 0402", Device Package="0402 (1005 Metric)", Manufacturer=KEMET, Operating Temperature="-55°C ~ 125°C", Ratings=AEC-Q200, Supplier Part Number 1=399-6828-1-ND, Temperature Coefficient=X7R, Tolerance=±10%, Voltage - Rated=16V, Applications="Automotive, Bypass, Decoupling", Capacitance="0.1 µF", ComponentLink1Description=Datasheet, ComponentLink1URL=https://api.kemet.com/component-edge/download/specsheet/C0402C104K4RACAUTO.pdf, ComponentLink2Description="DigiKey Link", ComponentLink2URL=https://www.digikey.com/en/products/detail/kemet/C0402C104K4RACAUTO/3314827, LastUpdated="8/14/2022 9:05:51 PM", Lifecycle Status=Active, Minimum Order=1, Mounting Type="Surface Mount, MLCC", Package / Case="0402 (1005 Metric)", Packaging=TapeAndReel, Part Number=C0402C104K4RACAUTO, Part Status=Active, PartId=3024, Price=0.01, Series="SMD Auto X7R", Size / Dimension="0.039\" L x 0.020\" W (1.00mm x 0.50mm)", Supplier 1=DigiKey, Thickness (Max)="0.022\" (0.55mm)"
C2 C3 C4 C5 C18 C19: library part 12106D107MAT4A, "CAP CER 100UF 6.3V X5R 1210", Device Package="1210 (3225 Metric)", Manufacturer="AVX Corporation", Operating Temperature="-55°C ~ 85°C", Supplier Part Number 1=478-11528-1-ND, Temperature Coefficient=X5R, Tolerance=±20%, Voltage - Rated=6.3V, Applications="General Purpose", Capacitance=100µF, ComponentLink1Description=Datasheet, ComponentLink1URL=http://datasheets.avx.com/cx5r.pdf, ComponentLink2Description="DigiKey Link", ComponentLink2URL=http://digikey.com/product-detail/en/avx-corporation/12106D107MAT4A/478-11528-1-ND/8107729, LastUpdated="9/2/2020 1:10:51 AM", Lifecycle Status=Active, Minimum Order=1, Mounting Type="Surface Mount, MLCC", Package / Case="1210 (3225 Metric)", Packaging=TapeAndReel, Part Number=12106D107MAT4A, Part Status=Active, PartId=23954, Price=0.33, Series=-, Size / Dimension="0.126\" L x 0.098\" W (3.20mm x 2.50mm)", Supplier 1=DigiKey, Thickness (Max)="0.110\" (2.79mm)"
C6 C9 C10 C12: library part GCJ188R71E105KA01D, "CAP CER 1UF 25V X7R 0603", Device Package="0603 (1608 Metric)", Manufacturer="Murata Electronics", Operating Temperature="-55°C ~ 125°C", Ratings=AEC-Q200, Supplier Part Number 1=490-14409-1-ND, Temperature Coefficient=X7R, Tolerance=±10%, Applications="Automotive, Boardflex Sensitive", Capacitance=1µF, ComponentLink1Description=Datasheet, ComponentLink1URL=https://search.murata.co.jp/Ceramy/image/img/A01X/G101/ENG/GCJ188R71E105KA01-01.pdf, ComponentLink2Description="DigiKey Link", ComponentLink2URL=http://digikey.com/product-detail/en/murata-electronics/GCJ188R71E105KA01D/490-14409-1-ND/6606870, Features="Soft Termination", LastUpdated="13-Aug-20 10:24:06 AM", Lifecycle Status=Active, Minimum Order=1, Mounting Type="Surface Mount, MLCC", Package / Case="0603 (1608 Metric)", Packaging=TapeAndReel, Part Number=GCJ188R71E105KA01D, Part Status=Active, PartId=9566, Price=0.05, Series=GCJ, Size / Dimension="0.063\" L x 0.031\" W (1.60mm x 0.80mm)", Supplier 1=DigiKey, Thickness (Max)="0.035\" (0.90mm)"
C7 C8 C15: library part GCG188R92A104KA03D, "CAP CER 0.1UF 100V 0603 EPOXY", Device Package="0603 (1608 Metric)", Manufacturer="Murata Electronics", Operating Temperature="-55°C ~ 150°C", Ratings=AEC-Q200, Supplier Part Number 1=490-18197-1-ND, Temperature Coefficient=X8R, Tolerance=±10%, Voltage - Rated=100V, Applications=Automotive, Capacitance=0.1µF, ComponentLink1Description=Datasheet, ComponentLink1URL=https://search.murata.co.jp/Ceramy/image/img/A01X/G101/ENG/GCG188R92A104KA03-01.pdf, ComponentLink2Description="DigiKey Link", ComponentLink2URL=http://digikey.com/product-detail/en/murata-electronics/GCG188R92A104KA03D/490-18197-1-ND/9867926, Features="Epoxy Mountable", LastUpdated="21-Jan-20 12:01:59 AM", Lifecycle Status=Active, Minimum Order=1, Mounting Type="Surface Mount, MLCC, Epoxy", Package / Case="0603 (1608 Metric)", Packaging=TapeAndReel, Part Number=GCG188R92A104KA03D, Part Status=Active, PartId=9025, Price=0.07, Series=GCG, Size / Dimension="0.063\" L x 0.031\" W (1.60mm x 0.80mm)", Supplier 1=DigiKey, Thickness (Max)="0.035\" (0.90mm)"
C11: library part C1608NP02A470J080AA, "CAP CER 47PF 100V NP0 0603", Device Package="0603 (1608 Metric)", Manufacturer="TDK Corporation", Operating Temperature="-55°C ~ 150°C", Supplier Part Number 1=445-14125-1-ND, Temperature Coefficient="C0G, NP0", Tolerance=±5%, Applications="General Purpose", Capacitance=47pF, ComponentLink1Description=Datasheet, ComponentLink1URL=https://product.tdk.com/info/en/catalog/datasheets/mlcc_commercial_hightemp_en.pdf?ref_disty=digikey, ComponentLink2Description="DigiKey Link", ComponentLink2URL=http://digikey.com/product-detail/en/tdk-corporation/C1608NP02A470J080AA/445-14125-1-ND/3955791, Features="High Temperature", LastUpdated="13-Aug-20 10:25:18 AM", Lifecycle Status=Active, Minimum Order=1, Mounting Type="Surface Mount, MLCC", Package / Case="0603 (1608 Metric)", Packaging=TapeAndReel, Part Number=C1608NP02A470J080AA, Part Status=Active, PartId=7049, Price=0.04, Series=C, Size / Dimension="0.063\" L x 0.031\" W (1.60mm x 0.80mm)", Supplier 1=DigiKey, Thickness (Max)="0.035\" (0.90mm)"
C13: library part CL21A226MOQNNNE, "CAP CER 22UF 16V X5R 0805", Device Package="0805 (2012 Metric)", Manufacturer="Samsung Electro-Mechanics", Operating Temperature="-55°C ~ 85°C", Supplier Part Number 1=1276-2909-1-ND, Temperature Coefficient=X5R, Tolerance=±20%, Voltage - Rated=16V, Applications="General Purpose", Capacitance=22µF, ComponentLink1Description=Datasheet, ComponentLink1URL=http://www.samsungsem.com/kr/support/product-search/mlcc/CL21A226MOQNNNE.jsp, ComponentLink2Description="DigiKey Link", ComponentLink2URL=http://digikey.com/product-detail/en/samsung-electro-mechanics/CL21A226MOQNNNE/1276-2909-1-ND/3890995, LastUpdated="21-Jan-20 12:03:05 AM", Lifecycle Status=Active, Minimum Order=1, Mounting Type="Surface Mount, MLCC", Package / Case="0805 (2012 Metric)", Packaging=TapeAndReel, Part Number=CL21A226MOQNNNE, Part Status=Active, PartId=3052, Price=0.11, Series=CL, Size / Dimension="0.079\" L x 0.049\" W (2.00mm x 1.25mm)", Supplier 1=DigiKey, Thickness (Max)="0.055\" (1.40mm)"
C14: library part C2012X7S1E106K125AC, "CAP CER 10UF 25V X7S 0805", Capacitance=10µF, Device Package="0805 (2012 Metric)", Manufacturer="TDK Corporation", Operating Temperature="-55°C ~ 125°C", Supplier Part Number 1=445-181600-1-ND, Temperature Coefficient=X7S, Tolerance=±10%, Voltage - Rated=25V, Applications="General Purpose", ComponentLink1Description=Datasheet, ComponentLink1URL=https://product.tdk.com/en/search/capacitor/ceramic/mlcc/info?part_no=C2012X7S1E106K125AC?ref_disty=digikey, ComponentLink2Description="DigiKey Link", ComponentLink2URL=http://digikey.com/product-detail/en/tdk-corporation/C2012X7S1E106K125AC/445-181600-1-ND/9991478, Features="Low ESL", LastUpdated="21-Jan-20 12:03:04 AM", Lifecycle Status=Active, Minimum Order=1, Mounting Type="Surface Mount, MLCC", Package / Case="0805 (2012 Metric)", Packaging=TapeAndReel, Part Number=C2012X7S1E106K125AC, Part Status=Active, PartId=3339, Price=0.15, Series=C, Size / Dimension="0.079\" L x 0.049\" W (2.00mm x 1.25mm)", Supplier 1=DigiKey, Thickness (Max)="0.057\" (1.45mm)"
D1: library part XZCDGK53W-8VF, "1.6X0.8MM LC GREEN PIXSOLED DOME", Current - Test=2mA, Device Package="0603 (1608 Metric)", Lens Color=Colorless, Manufacturer=SunLED, Millicandela Rating=417mcd, Supplier Device Package=2-SMD, Supplier Part Number 1=1497-XZCDGK53W-8VFCT-ND, Voltage - Forward (Vf) (Typ)=2.65V, Color=Green, ComponentLink1Description=Datasheet, ComponentLink1URL=https://www.sunledusa.com/products/spec/XZCDGK53W-8VF.pdf, ComponentLink2Description="DigiKey Link", ComponentLink2URL=http://digikey.com/product-detail/en/sunled/XZCDGK53W-8VF/1497-XZCDGK53W-8VFCT-ND/10449792, Configuration=Independent, Height (Max)=1.10mm, LastUpdated="21-Jan-20 3:12:09 AM", Lens Size="0.35mm Dia", Lens Style="Round with Domed Top", Lens Transparency=Clear, Lifecycle Status=Active, Minimum Order=1, Mounting Type="Surface Mount", Package / Case="0603 (1608 Metric)", Packaging=Unknown, Part Number=XZCDGK53W-8VF, Part Status=Active, PartId=938, Price=0.18, Series="Ultra Low Current", Size / Dimension="1.60mm L x 0.80mm W", Supplier 1=DigiKey, Viewing Angle=60°, Wavelength - Dominant=525nm, Wavelength - Peak=515nm
L1: library part MLP2520S4R7ST0S1, "FIXED IND 4.7UH 1A 110 MOHM SMD", Current Rating (Amps)=1A, DC Resistance (DCR)="143mOhm Max", Device Package="1008 (2520 Metric)", Inductance Frequency - Test=2MHz, Manufacturer="TDK Corporation", Operating Temperature="-40°C ~ 125°C", Supplier Part Number 1=445-6378-1-ND, Tolerance=±20%, ComponentLink1Description=Datasheet, ComponentLink1URL=https://product.tdk.com/info/en/catalog/datasheets/inductor_commercial_power_mlp2520_en.pdf?ref_disty=digikey, ComponentLink2Description="DigiKey Link", ComponentLink2URL=http://digikey.com/product-detail/en/tdk-corporation/MLP2520S4R7ST0S1/445-6378-1-ND/2465705, Height - Seated (Max)="0.039\" (1.00mm)", Inductance=4.7µH, LastUpdated="13-Aug-20 11:03:40 AM", Lifecycle Status=Active, Material - Core=Ferrite, Minimum Order=1, Mounting Type="Surface Mount", Package / Case="1008 (2520 Metric)", Packaging=TapeAndReel, Part Number=MLP2520S4R7ST0S1, Part Status=Active, PartId=3467, Price=0.14, Series=MLP, Shielding=Shielded, Size / Dimension="0.098\" L x 0.079\" W (2.50mm x 2.00mm)", Supplier 1=DigiKey, Supplier Device Package="1008 (2520 Metric)", Type=Multilayer
P2 P3: "WR-PHD Pin Header, THT, pitch 2mm, Dual Row, Vertical, 4p", Contact Resistance=20mOhm, Manufacturer="Wurth Elektronik", Operating Temperature="-40 to +105degC", Rated Current=2A, Withstanding Voltage=500VAC, Working Voltage=200VAC, ComponentLink1Description=Manufacturer, ComponentLink1URL=http://www.we-online.de, ComponentLink2Description=Datasheet, ComponentLink2URL=https://www.we-online.com/catalog/datasheet/62000421121.pdf, Gender="Pin Header", Manufacturer Part Number=62000421121, Mounting Technology=THT, Orientation=Vertical, Packaging=Bag, Pin Number=4, Pitch=2mm, Published Date="May 2020", Row Number=Dual
Q1_1 Q1_2 Q1_3 Q1_4 Q2_1 Q2_2 Q2_3 Q2_4 Q3_1 Q3_2 Q3_3 Q3_4 Q4_1 Q4_2 Q4_3 Q4_4 Q5_1 Q5_2 Q5_3 Q5_4 Q6_1 Q6_2 Q6_3 Q6_4: "N-FET"
R1: library part RNCF0603DTE1K00, "RES 1K OHM 0.5% 1/10W 0603", Device Package="0603 (1608 Metric)", Manufacturer="Stackpole Electronics Inc", Operating Temperature="-55°C ~ 155°C", Power (Watts)="0.1W, 1/10W", Ratings=AEC-Q200, Supplier Device Package=0603, Supplier Part Number 1=RNCF0603DTE1K00CT-ND, Temperature Coefficient=±25ppm/°C, Tolerance=±0.5%, ComponentLink1Description=Datasheet, ComponentLink1URL=https://www.seielect.com/catalog/sei-rncf.pdf, ComponentLink2Description="DigiKey Link", ComponentLink2URL=http://digikey.com/product-detail/en/stackpole-electronics-inc/RNCF0603DTE1K00/RNCF0603DTE1K00CT-ND/9915086, Composition="Thin Film", Features="Automotive AEC-Q200", Height - Seated (Max)="0.022\" (0.55mm)", LastUpdated="21-Jan-20 12:14:28 AM", Lifecycle Status=Active, Minimum Order=1, Number of Terminations=2, Package / Case="0603 (1608 Metric)", Packaging=TapeAndReel, Part Number=RNCF0603DTE1K00, Part Status=Active, PartId=26300, Price=0.05, Resistance="1 kOhms", Series=RNCF, Size / Dimension="0.061\" L x 0.031\" W (1.55mm x 0.80mm)", Supplier 1=DigiKey
R1_1 R1_2 R1_3 R1_4 R2_1 R2_2 R2_3 R2_4 R3_1 R3_2 R3_3 R3_4: library part ERJ-3BWFR020V, "RES 0.02 OHM 1% 1/3W 0603", Device Package="0603 (1608 Metric)", Manufacturer="Panasonic Electronic Components", Operating Temperature="-55°C ~ 155°C", Power (Watts)="0.333W, 1/3W", Ratings=AEC-Q200, Supplier Device Package=0603, Supplier Part Number 1=P17461CT-ND, Temperature Coefficient=±250ppm/°C, Tolerance=±1%, ComponentLink1Description=Datasheet, ComponentLink1URL=https://industrial.panasonic.com/cdbs/www-data/pdf/RDN0000/AOA0000C313.pdf, ComponentLink2Description="DigiKey Link", ComponentLink2URL=https://www.digikey.com/en/products/detail/panasonic-electronic-components/ERJ-3BWFR020V/5647494, Composition="Thick Film", Features="Automotive AEC-Q200, Current Sense", Height - Seated (Max)="0.026\" (0.65mm)", LastUpdated="8/14/2022 9:50:04 PM", Lifecycle Status=Active, Minimum Order=1, Number of Terminations=2, Package / Case="0603 (1608 Metric)", Packaging=TapeAndReel, Part Number=ERJ-3BWFR020V, Part Status=Active, PartId=64, Price=0.06, Resistance="20 mOhms", Series=ERJ-3BW, Size / Dimension="0.063\" L x 0.031\" W (1.60mm x 0.80mm)", Supplier 1=DigiKey
R2 R4: library part RNCS0603BKE10K0, "RES 10K OHM 0.1% 1/16W 0603", Device Package="0603 (1608 Metric)", Manufacturer="Stackpole Electronics Inc", Operating Temperature="-55°C ~ 155°C", Power (Watts)="0.063W, 1/16W", Ratings=AEC-Q200, Supplier Device Package=0603, Supplier Part Number 1=RNCS0603BKE10K0CT-ND, Temperature Coefficient=±25ppm/°C, Tolerance=±0.1%, ComponentLink1Description=Datasheet, ComponentLink1URL=https://www.seielect.com/catalog/sei-rncs_rnch.pdf, ComponentLink2Description="DigiKey Link", ComponentLink2URL=http://digikey.com/product-detail/en/stackpole-electronics-inc/RNCS0603BKE10K0/RNCS0603BKE10K0CT-ND/1800113, Composition="Thin Film", Features="Anti-Corrosive, Automotive AEC-Q200, Moisture Resistant", Height - Seated (Max)="0.022\" (0.55mm)", LastUpdated="21-Jan-20 12:25:01 AM", Lifecycle Status=Active, Minimum Order=1, Number of Terminations=2, Package / Case="0603 (1608 Metric)", Packaging=TapeAndReel, Part Number=RNCS0603BKE10K0, Part Status=Active, PartId=4838, Price=0.08, Resistance="10 kOhms", Series=RNCS, Size / Dimension="0.061\" L x 0.031\" W (1.55mm x 0.80mm)", Supplier 1=DigiKey
R3: library part RT0603DRD0740K2L, "RES SMD 40.2KOHM 0.5% 1/10W 0603", Device Package="0603 (1608 Metric)", Manufacturer=Yageo, Operating Temperature="-55°C ~ 155°C", Power (Watts)="0.1W, 1/10W", Supplier Device Package=0603, Supplier Part Number 1=311-40.2KDCT-ND, Temperature Coefficient=±25ppm/°C, Tolerance=±0.5%, ComponentLink1Description=Datasheet, ComponentLink1URL=https://www.yageo.com/upload/media/product/productsearch/datasheet/rchip/PYu-RT_1-to-0.01_RoHS_L_11.pdf, ComponentLink2Description="DigiKey Link", ComponentLink2URL=http://digikey.com/product-detail/en/yageo/RT0603DRD0740K2L/311-40.2KDCT-ND/1035817, Composition="Thin Film", Height - Seated (Max)="0.022\" (0.55mm)", LastUpdated="13-Aug-20 10:36:48 AM", Lifecycle Status=Active, Minimum Order=1, Number of Terminations=2, Package / Case="0603 (1608 Metric)", Packaging=TapeAndReel, Part Number=RT0603DRD0740K2L, Part Status=Active, PartId=18076, Price=0.02, Resistance="40.2 kOhms", Series=RT, Size / Dimension="0.063\" L x 0.031\" W (1.60mm x 0.80mm)", Supplier 1=DigiKey
R4_1 R4_2 R4_3 R4_4 R5_1 R5_2 R5_3 R5_4 R6_1 R6_2 R6_3 R6_4 R7_1 R7_2 R7_3 R7_4 R8_1 R8_2 R8_3 R8_4 R9_1 R9_2 R9_3 R9_4 R10_1 R10_2 R10_3 R10_4 R11_1 R11_2 R11_3 R11_4 R12_1 R12_2 R12_3 R12_4: library part RK73H1ETTP1432F, "RES 14.3K OHM 1% 1/10W 0402", Device Package="0402 (1005 Metric)", Manufacturer="KOA Speer Electronics, Inc.", Operating Temperature="-55°C ~ 155°C", Power (Watts)="0.1W, 1/10W", Ratings=AEC-Q200, Resistance="14.3 kOhms", Supplier Device Package=0402, Supplier Part Number 1=2019-RK73H1ETTP1432FCT-ND, Temperature Coefficient=±100ppm/°C, Tolerance=±1%, ComponentLink1Description=Datasheet, ComponentLink1URL=http://www.koaspeer.com/catimages/Products/RK73H/RK73H.pdf, ComponentLink2Description="DigiKey Link", ComponentLink2URL=https://www.digikey.com/en/products/detail/koa-speer-electronics-inc/RK73H1ETTP1432F/9844351, Composition="Thick Film", Features="Automotive AEC-Q200, Moisture Resistant", Height - Seated (Max)="0.016\" (0.40mm)", LastUpdated="8/14/2022 9:23:49 PM", Lifecycle Status=Active, Minimum Order=1, Number of Terminations=2, Package / Case="0402 (1005 Metric)", Packaging=CutTape, Part Number=RK73H1ETTP1432F, Part Status=Active, PartId=10193, Price=0.01, Series=RK73H, Size / Dimension="0.039\" L x 0.020\" W (1.00mm x 0.50mm)", Supplier 1=DigiKey
R5: library part CR0603-JW-753ELF, "RES SMD 75K OHM 5% 1/10W 0603", Device Package="0603 (1608 Metric)", Manufacturer="Bourns Inc.", Operating Temperature="-55°C ~ 155°C", Power (Watts)="0.1W, 1/10W", Supplier Device Package=0603, Supplier Part Number 1=CR0603-JW-753ELFCT-ND, Temperature Coefficient=±200ppm/°C, Tolerance=±5%, ComponentLink1Description=Datasheet, ComponentLink1URL=https://www.bourns.com/docs/Product-Datasheets/CHPREZTR.pdf, ComponentLink2Description="DigiKey Link", ComponentLink2URL=http://digikey.com/product-detail/en/bourns-inc/CR0603-JW-753ELF/CR0603-JW-753ELFCT-ND/4247893, Composition="Thick Film", Features="Moisture Resistant", Height - Seated (Max)="0.022\" (0.55mm)", LastUpdated="13-Aug-20 10:36:37 AM", Lifecycle Status=Active, Minimum Order=1, Number of Terminations=2, Package / Case="0603 (1608 Metric)", Packaging=CutTape, Part Number=CR0603-JW-753ELF, Part Status=Active, PartId=23428, Price=0.10, Resistance="75 kOhms", Series=CR0603, Size / Dimension="0.063\" L x 0.031\" W (1.60mm x 0.80mm)", Supplier 1=DigiKey
R6: library part RMCF0603FT7K68, "RES 7.68K OHM 1% 1/10W 0603", Device Package="0603 (1608 Metric)", Manufacturer="Stackpole Electronics Inc", Operating Temperature="-55°C ~ 155°C", Power (Watts)="0.1W, 1/10W", Ratings=AEC-Q200, Supplier Device Package=0603, Supplier Part Number 1=RMCF0603FT7K68CT-ND, Temperature Coefficient=±100ppm/°C, Tolerance=±1%, ComponentLink1Description=Datasheet, ComponentLink1URL=https://www.seielect.com/catalog/sei-rmcf_rmcp.pdf, ComponentLink2Description="DigiKey Link", ComponentLink2URL=http://digikey.com/product-detail/en/stackpole-electronics-inc/RMCF0603FT7K68/RMCF0603FT7K68CT-ND/4425120, Composition="Thick Film", Features="Automotive AEC-Q200", Height - Seated (Max)="0.022\" (0.55mm)", LastUpdated="13-Aug-20 10:36:44 AM", Lifecycle Status=Active, Minimum Order=1, Number of Terminations=2, Package / Case="0603 (1608 Metric)", Packaging=CutTape, Part Number=RMCF0603FT7K68, Part Status=Active, PartId=20370, Price=0.10, Resistance="7.68 kOhms", Series=RMCF, Size / Dimension="0.061\" L x 0.031\" W (1.55mm x 0.80mm)", Supplier 1=DigiKey
TP1_1 TP1_2 TP1_3 TP1_4 TP2_1 TP2_2 TP2_3 TP2_4: library part "TP 0.635mm", "Test point"
U1: library part MIC5504-3.3YM5, "3.3V LDO"
U1_1 U1_2 U1_3 U1_4: "3 Phase Gate Driver 1.5-2.2A", Package="VSON-10 Texas Instruments", Availability=Warning, DigiKey-Purchase-URL=https://snapeda.com/shop?store=DigiKey&id=3625400, MF="Texas Instruments", MP=UCC27282DRCR, Price=None, SnapEDA_Link=https://www.snapeda.com/parts/UCC27282DRCR/Texas%20Instruments/view-part/3625400/?ref=snap, Texas_Instruments-Purchase-URL=https://snapeda.com/shop?store=Texas+Instruments&id=3625400
U2: "ADJ step down Buck"
U3_1 U3_2 U3_3 U3_4: "6-DOF IMU"

## Free pads (board coordinates)
  rect 2.8x2.4 smd: 1(-15,-2.2) 1(-15,2.2) 1(15,-2.2) 1(15,2.2) 2(-15,-5.9) 2(15,-5.9) 2(15,5.9) 3(-15,-9.6) 3(-15,5.9) 3(-15,9.6) 3(15,-9.6) 3(15,9.6)
  round 1.524 hole 2.2: 1(-13,-13) 1(-13,13) 1(13,-13) 1(13,13)
  rect 6x3 smd: 2(-6.8,-14.8) 2(6.8,-14.8)

## Via types
v1: diameter 0.4, hole 0.2, Top Layer to Bottom Layer, tented both sides, 163 vias
v2: diameter 0.55, hole 0.3, Top Layer to Bottom Layer, tented both sides, 32 vias

## Nets (pads, with @x,y where several pads share a name; then routed paths per layer and width w, separated by ;. In a path a pad name is that pad's centre, name@x,y a point inside that pad or via, vN(x,y) a via of type N, cw(c..) or ccw(c..) an arc to the next point about the centre after c; other vN are vias at no path point)
3V3: C8.1 C9.2 C16_1.2 C16_2.2 C16_3.2 C16_4.2 C17_1.2 C17_2.2 C17_3.2 C17_4.2 U1.5 U3_1.5 U3_1.17 U3_2.5 U3_2.17 U3_3.5 U3_3.17 U3_4.5 U3_4.17 | length 2.9
  Top Layer w0.254: U1.5@1.95,24.175 2.025,24.25 C9.2@3.4,24.25 C8.1@4.8,24.25
5V: C6.2 C7.1 C11.2 C12.2 C13.2 L1.2 R1.1 R2.2 R3.2 U1.1 | length 4.9
  Top Layer w0.254: R2.2@1.65,28.525 1.948,28.227 1.948,27.758 1.95,27.756 ; U1.1@1.95,26.875 1.95,27.877 3.077,27.877 C6.2@3.4,28.2 C7.1@4.8,28.2
G1_H_1: Q3_1.4 U1_1.13 | length 5.5
  Top Layer w0.254: v1(-6.8,4.4) -6.772,4.428 -6.772,4.983 Q3_1.4@-6.725,5.03
  Bottom Layer w0.254: U1_1.13@-7.535,8.25 -7.596,8.25 -7.604,8.242 -7.604,6.408 -7.862,6.15 -7.862,4.782 -7.481,4.401 v1@-6.867,4.401 ; v1@-6.867,4.4 v1(-6.8,4.4)
G1_H_2: Q3_2.4 U1_2.19
G1_H_3: Q3_3.4 U1_3.13 | length 6.1
  Top Layer w0.254: Q3_3.4@9.17,-1.725 9.185,-1.71 9.185,-1.115 v1(9.2,-1.1)
  Bottom Layer w0.254: U1_3.13@7.435,-5.65 7.312,-5.65 7.304,-5.642 7.304,-2.996 v1(9.2,-1.1)
G1_H_4: Q3_4.4 U1_4.19 | length 3.2
  Top Layer w0.254: Q3_4.4@-9.17,-3.675 -9.05,-3.675 -8.967,-3.758 -8.967,-3.893 -8.8,-4.06 v1(-8.8,-4.1)
  Bottom Layer w0.254: v1(-8.8,-4.1) -8.76,-4.1 -8.66,-4.2 -7.89,-4.2 -7.394,-4.696 -6.758,-4.696 -6.75,-4.704 U1_4.19@-6.75,-4.965
G1_L_1: Q4_1.4 U1_1.9 | length 9.2
  Top Layer w0.254: Q4_1.4@-10.425,1.83 -9.9,1.83 v1(-9.9,1.8)
  Layer 2 w0.254: v1(-9.9,1.8) -8.655,1.8 -5.043,5.412 -5.043,6.503 -5.3,6.76 v1(-5.3,6.8)
  Bottom Layer w0.254: U1_1.9@-5.35,7.565 -5.342,7.557 -5.342,6.882 -5.3,6.84 v1(-5.3,6.8)
G1_L_2: Q4_2.4 U1_2.11
G1_L_3: Q4_3.4 U1_3.9 | length 11.9
  Top Layer w0.254: Q4_3.4@12.575,-3.97 12.6,-3.995 v1(12.6,-4)
  Layer 2 w0.254: v1(4.7,-4.1) 4.7,-2.6 5.146,-2.154 11.354,-2.154 12.6,-3.4 v1(12.6,-4)
  Bottom Layer w0.254: v1(4.7,-4.1) 4.728,-4.128 4.921,-4.128 5.242,-4.449 5.242,-4.957 U1_3.9@5.25,-4.965
G1_L_4: Q4_4.4 U1_4.11 | length 15.6
  Top Layer w0.254: Q4_4.4@-10.625,-3.97 -10.61,-3.985 -10.115,-3.985 v1(-10.1,-4)
  Layer 2 w0.254: v1(-10.1,-4) -7.25,-6.85 -6.65,-6.85 v1(-3.8,-9.7)
  Bottom Layer w0.254: U1_4.11@-6.25,-8.835 -6.242,-8.843 -6.242,-9.635 -4.45,-11.427 -3.582,-11.427 -3.273,-11.118 -3.273,-10.027 -3.572,-9.728 -3.772,-9.728 v1(-3.8,-9.7)
G2_H_1: Q1_1.4 U1_1.16 | length 1.8
  Top Layer w0.254: Q1_1.4@-9.17,9.25 -9.166,9.254 v1(-9.146,9.254)
  Bottom Layer w0.254: v1(-9.146,9.254) -8.65,9.75 U1_1.16@-7.535,9.75
G2_H_2: Q1_2.4 U1_2.16
G2_H_3: Q1_3.4 U1_3.16 | length 4
  Top Layer w0.254: Q1_3.4@9.17,-5.625 9.185,-5.61 9.185,-5.115 v1(9.2,-5.1)
  Bottom Layer w0.254: U1_3.16@7.435,-7.15 8.55,-7.15 9.2,-6.5 v1(9.2,-5.1)
G2_H_4: Q1_4.4 U1_4.16 | length 3.7
  Top Layer w0.254: v1(-9.4,-8.055) -9.372,-8.027 -9.372,-7.658 -9.253,-7.658 Q1_4.4@-9.17,-7.575
  Bottom Layer w0.254: v1(-9.4,-8.055) -9.4,-7.2 -8.85,-6.65 U1_4.16@-7.435,-6.65
G2_L_1: Q5_1.4 U1_1.10 | length 7.6
  Top Layer w0.254: v1(-10.1,8.7) -10.072,8.672 -10.072,8.217 Q5_1.4@-10.03,8.175
  Layer 2 w0.254: v1(-10.1,8.7) -8.069,8.7 v1(-5.57,6.201)
  Bottom Layer w0.254: U1_1.10@-5.85,7.565 -5.85,6.521 -5.57,6.241 v1(-5.57,6.201)
G2_L_2: Q5_2.4 U1_2.10